# Allegro board FIBER-E1-PWR_01v0.brd
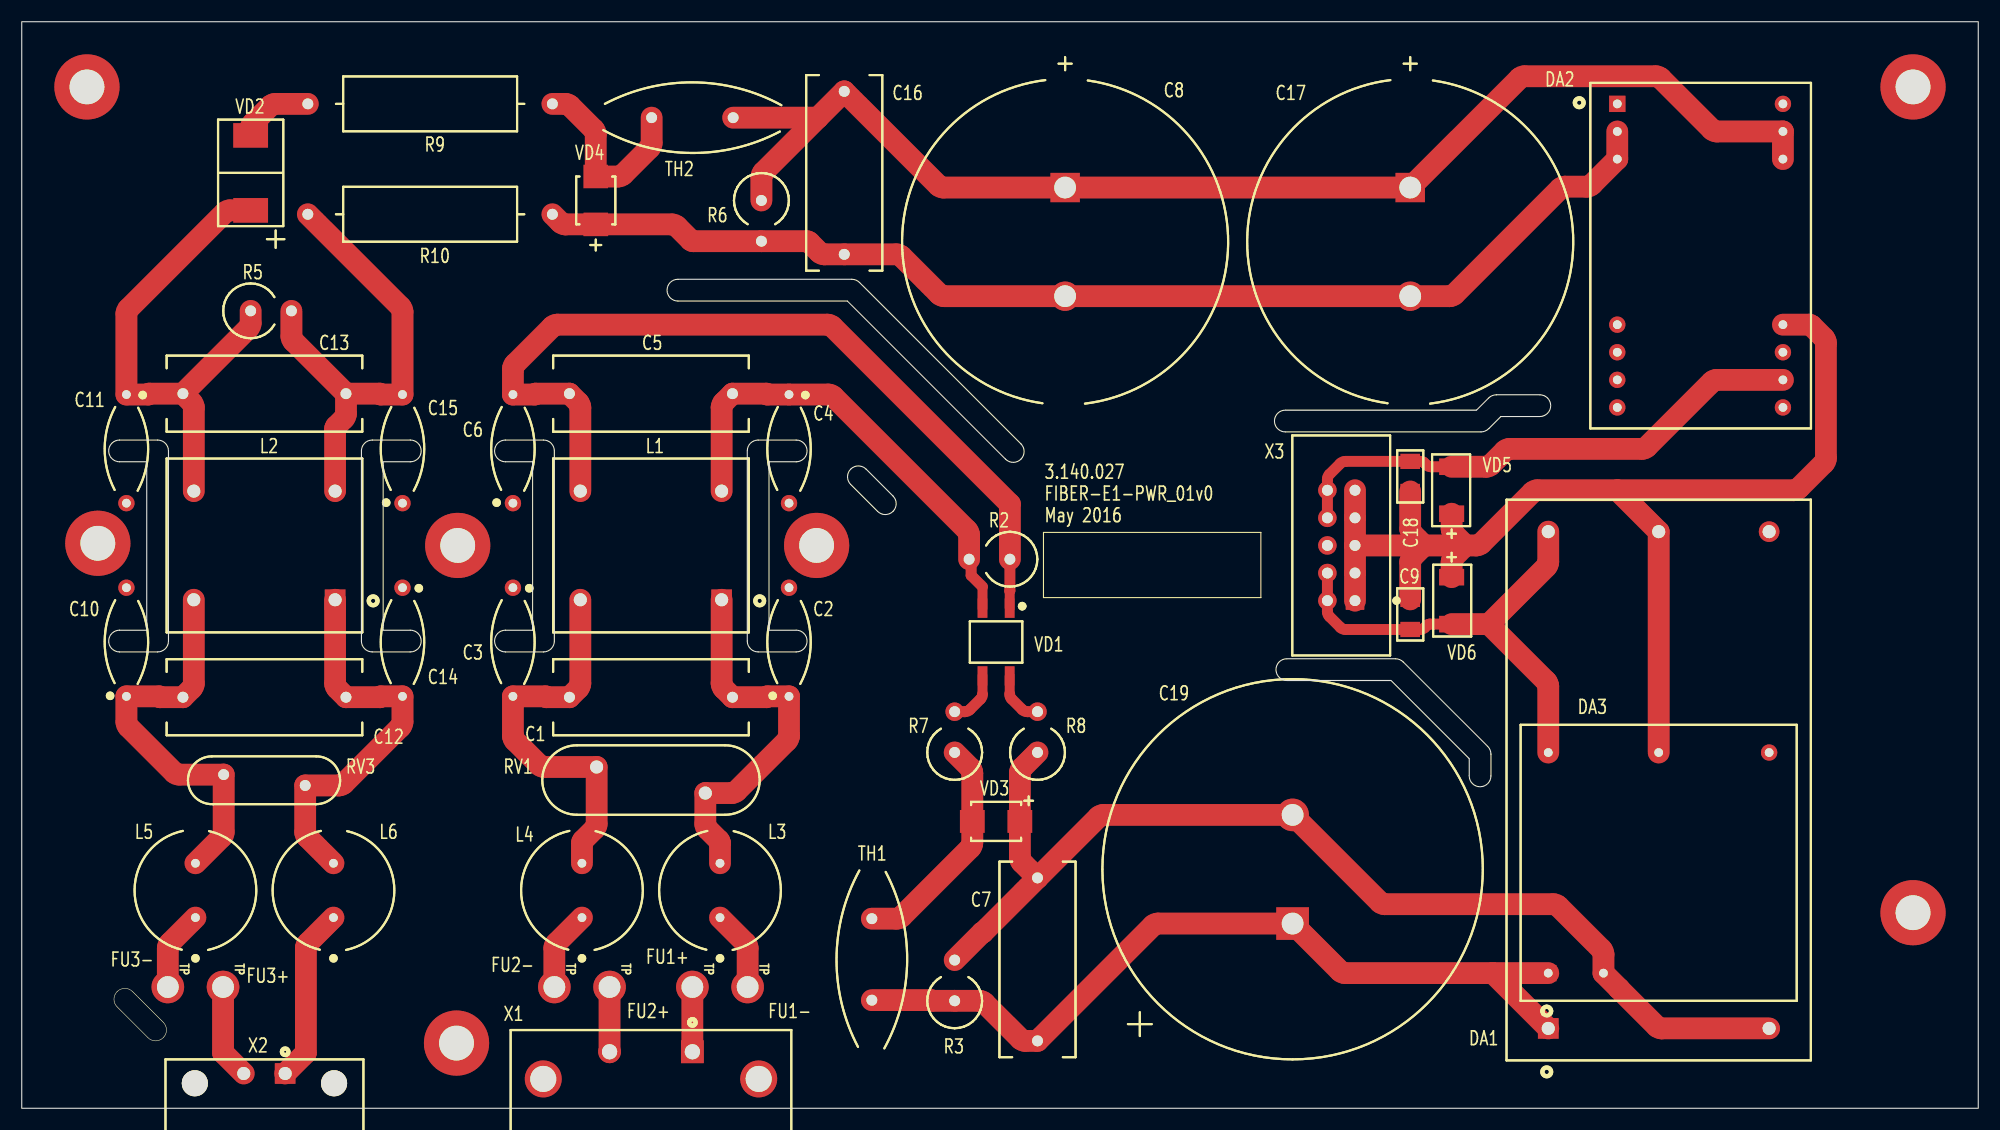
[diagram p0: board, top side]
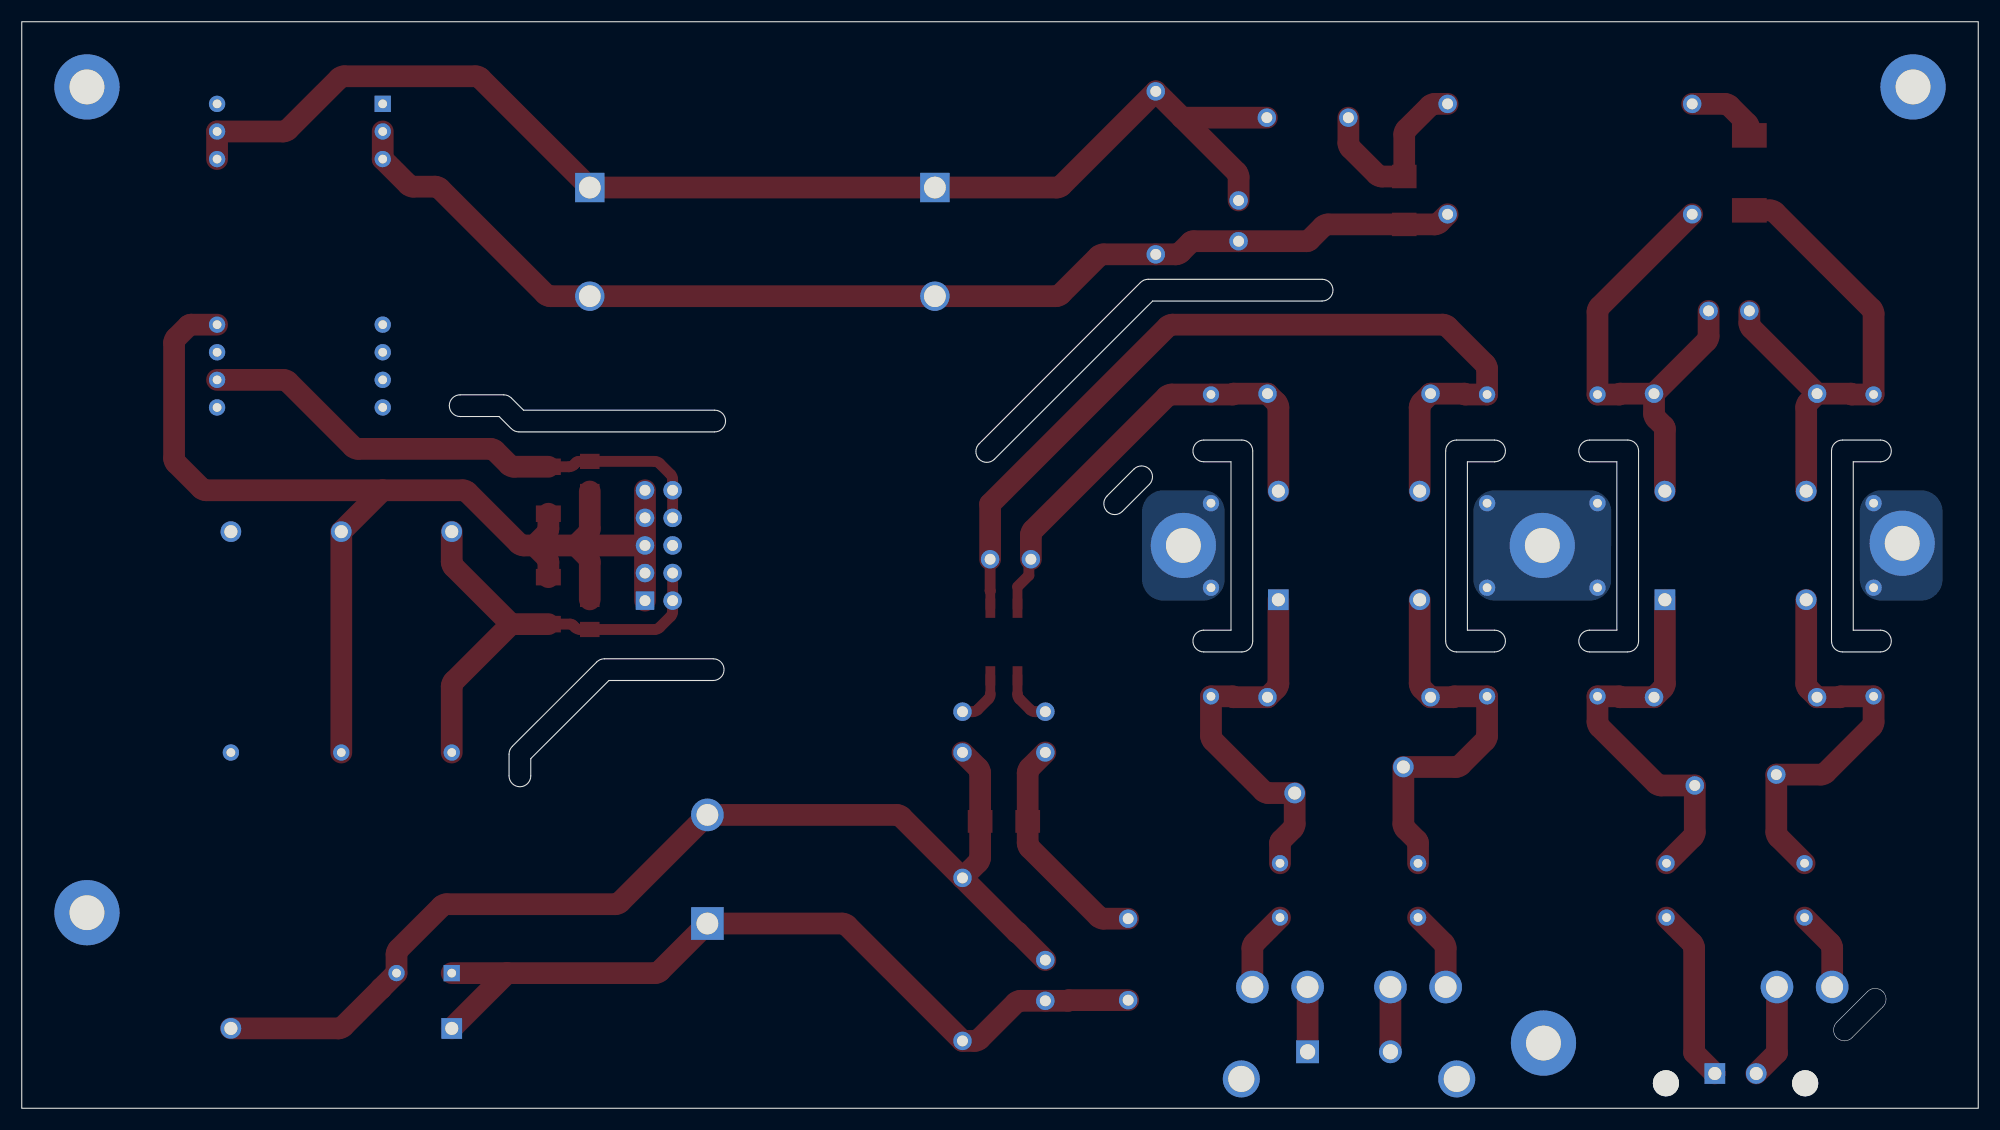
[diagram p1: board, bottom side, seen from below]

Outline 180 x 100 mm; copper layers: TOP, BOTTOM. Coordinates in mm from the lower left corner of the outline.
Outline path: rectangle 0,0 180,100 ; 8.78,10.74 arc(9.49,11.03) 10.19,10.74 13.02,7.91 arc(13.31,7.21) 13.02,6.5 arc(12.31,6.21) 11.61,6.5 8.78,9.33 arc(8.49,10.03) 8.78,10.74 ; 9,61.5 12.5,61.5 arc(13.21,61.21) 13.5,60.5 13.5,43 arc(13.21,42.29) 12.5,42 9,42 arc(8,43) 9,44 11.5,44 11.5,59.5 9,59.5 arc(8,60.5) 9,61.5 ; 31.25,60.5 arc(31.54,61.21) 32.25,61.5 35.75,61.5 arc(36.75,60.5) 35.75,59.5 33.25,59.5 33.25,44 35.75,44 arc(36.75,43) 35.75,42 32.25,42 arc(31.54,42.29) 31.25,43 31.25,60.5 ; 44.5,61.5 48,61.5 arc(48.71,61.21) 49,60.5 49,43 arc(48.71,42.29) 48,42 44.5,42 arc(43.5,43) 44.5,44 47,44 47,59.5 44.5,59.5 arc(43.5,60.5) 44.5,61.5 ; 60.37,76.3 76.37,76.3 arc(76.76,76.22) 77.09,75.99 91.92,61.15 arc(92.22,60.45) 91.92,59.74 arc(91.22,59.45) 90.51,59.74 75.95,74.3 60.37,74.3 arc(59.37,75.3) 60.37,76.3 ; 66.75,60.5 arc(67.04,61.21) 67.75,61.5 71.25,61.5 arc(72.25,60.5) 71.25,59.5 68.75,59.5 68.75,44 71.25,44 arc(72.25,43) 71.25,42 67.75,42 arc(67.04,42.29) 66.75,43 66.75,60.5 ; 76.27,58.83 arc(76.97,59.12) 77.68,58.83 80.16,56.35 arc(80.45,55.64) 80.16,54.94 arc(79.45,54.64) 78.74,54.94 76.27,57.41 arc(75.97,58.12) 76.27,58.83 ; 116.25,64.25 133.84,64.25 134.94,65.36 arc(135.27,65.58) 135.66,65.66 139.66,65.66 arc(140.66,64.66) 139.66,63.66 136.08,63.66 134.97,62.55 arc(134.64,62.33) 134.25,62.25 116.25,62.25 arc(115.25,63.25) 116.25,64.25 ; 116.39,41.37 126.39,41.37 arc(126.78,41.29) 127.11,41.06 134.86,33.31 arc(135.09,32.98) 135.17,32.59 135.17,30.59 arc(134.17,29.59) 133.17,30.59 133.17,32.18 125.98,39.37 116.39,39.37 arc(115.39,40.37) 116.39,41.37

## Design rules (mm)
nets with their own width: min track width 2; nets GND_EARTH

## Placement (name value [footprint] x y rotation side)
C1  0.22uF  [CAPRR1500W80L1800T700H1250N]  57.89 37.83 0 top
C2  470pF  [CAPRR1000W55L900T400H900N]  70.59 42.91 90 top
C3  470pF  [CAPRR1000W55L900T400H900N]  45.19 42.91 270 top
C4  470pF  [CAPRR1000W55L900T400H900N]  70.59 60.69 270 top
C5  0.22uF  [CAPRR1500W80L1800T700H1250N]  57.89 65.77 0 top
C6  470pF  [CAPRR1000W55L900T400H900N]  45.19 60.69 90 top
C7  0.22uF  [CAPRR1500W80L1800T700H1250N]  93.45 13.7 270 top
C8  4700uF  [CAPPRR1000W150L3000T3000H4000N]  95.99 79.74 270 top
C9  1uF  [CAPC3216X110N]  127.74 45.45 90 top
C10  470pF  [CAPRR1000W55L900T400H900N]  9.63 42.91 90 top
C11  470pF  [CAPRR1000W55L900T400H900N]  9.63 60.69 270 top
C12  0.22uF  [CAPRR1500W80L1800T700H1250N]  22.33 37.83 180 top
C13  0.22uF  [CAPRR1500W80L1800T700H1250N]  22.33 65.77 180 top
C14  470pF  [CAPRR1000W55L900T400H900N]  35.03 42.91 270 top
C15  470pF  [CAPRR1000W55L900T400H900N]  35.03 60.69 90 top
C16  0.22uF  [CAPRR1500W80L1800T700H1250N]  75.67 86.09 90 top
C17  4700uF  [CAPPRR1000W150L3000T3000H4000N]  127.74 79.74 270 top
C18  1uF  [CAPC3216X110N]  127.74 58.15 270 top
C19  470uF  [CAPPRR1000W55L3500T3500H5000N]  116.92 22 90 top
DA1  AMEL5-5SEMAZ  [DIP1016P4572X1780-6N]  150.6 30.21 90 top
DA2  AM3T-4805SH35Z  [DIP254P1524X1020-24N]  154.41 78.47 0 top
DA3  TMPS 03-105  [DIP1016P2030X1630-6N]  150.6 22.59 90 top
FU1+  TP  [KP_W150H100]  61.7 11.16 0 top
FU1-  TP  [KP_W150H100]  66.78 11.16 0 top
FU2+  TP  [KP_W150H100]  54.08 11.16 0 top
FU2-  TP  [KP_W150H100]  49 11.16 0 top
FU3+  TP  [KP_W150H100]  18.52 11.16 0 top
FU3-  TP  [KP_W150H100]  13.44 11.16 0 top
L1  PLY10AN1521R6R2B  [FIL_PLY10]  57.89 51.8 180 top
L2  PLY10AN1521R6R2B  [FIL_PLY10]  22.33 51.8 180 top
L3  22u  [INDRR500W65L1120T1120H1220N]  64.24 20.05 90 top
L4  22u  [INDRR500W65L1120T1120H1220N]  51.54 20.05 90 top
L5  22u  [INDRR500W65L1120T1120H1220N]  15.98 20.05 90 top
L6  22u  [INDRR500W65L1120T1120H1220N]  28.68 20.05 90 top
NOREF  -  [unnamed]  174 18 0 top
NOREF#2  -  [#2]  6 94 0 top
NOREF#3  -  [#2]  121.39 51.8 0 top
NOREF#4  -  [#2]  0 0 90 top
NOREF#5  -  [unnamed]  6 94 0 top
NOREF#6  -  [unnamed]  174 94 0 top
NOREF#7  TP  [unnamed]  40 6 0 top
NOREF#8  -  [#2]  0 100 0 top
NOREF#9  -  [#2]  40 6 90 top
NOREF#10  -  [#2]  174 18 90 top
NOREF#11  -  [#2]  70.8 -4.8 90 top
NOREF#12  -  [#2]  6 94 90 top
NOREF#13  -  [#2]  40 6 0 top
NOREF#14  -  [#2]  121.39 51.8 90 top
R2  1M  [RESAD2250W80L1600D505N]  90.91 50.53 0 top
R3  1M  [RESAD2250W80L1600D505N]  85.83 9.89 270 top
R5  1M  [RESAD2250W80L1600D505N]  21.06 73.39 180 top
R6  1M  [RESAD2250W80L1600D505N]  68.05 83.55 90 top
R7  510  [RESAD2250W80L1600D505N]  85.83 32.75 270 top
R8  510  [RESAD2250W80L1600D505N]  93.45 32.75 270 top
R9  5.1  [RESAD2250W80L1600D505N#2]  37.57 92.44 0 top
R10  5.1  [RESAD2250W80L1600D505N#2]  37.57 82.28 0 top
RV1  390V  [VAR_JVR-20N391K]  57.89 30.21 180 top
RV3  82V  [VAR_JVR-14N820K]  22.33 30.21 0 top
TH1  7  [RESRB750W80L1750T650H2300]  78.21 13.7 90 top
TH2  7  [RESRB750W80L1750T650H2300]  61.7 91.17 180 top
TP1  TP  [KP_W310H180]  40.11 51.8 0 top
TP2  TP  [KP_W310H180]  73.13 51.8 0 top
TP3  TP  [KP_W310H180]  7 52 0 top
VD1  B8S  [SOT250P700X270-4N]  89.64 42.91 270 top
VD2  S3M  [DIOM7959X265N]  21.06 86.09 270 top
VD3  400V  [DIOM5436X230N]  89.64 26.4 0 top
VD4  48V  [DIOM5436X250N]  52.81 83.55 270 top
VD5  6V8  [DIOM5336X265N]  131.55 56.88 270 top
VD6  6V8  [DIOM5336X265N]  131.55 46.72 90 top
X1  220VAC  [PHOENIX_1806229]  61.7 5.2 0 top
X2  48VDC  [PHOENIX_1827868]  24.23 3.2 0 top
X3  IDC-10M  [SHDR0S254P5X2_2025X900X900]  122.66 46.72 90 top

## Library data of the parts
C1-C7 C9-C16 C18 = CAPACITOR
C8 C17 C19 = CAPACITOR_POL
DA1 = AMEL5_xSxMAZ
DA2 = AM3T_SH35Z_3
DA3 = TRACO_TMPS 03_0
FU1+ FU1- FU2+ FU2- FU3+ FU3- TP1-TP3 = TP
L1 L2 = PLY10_0
L3-L6 = INDUCTOR
R2 R3 R5 R6 = R_0: alternate symbols: (RESAD375W80L505D505N)
R7-R10 = R_2W: alternate symbols: (RESAD375W80L505D505N)
RV1 RV3 = VARISTOR
TH1 TH2 = thermistor
VD1 = DIOD_MOST_0
VD2 = DIODE
VD3 = SUPRESSOR_POL_0
VD4 = SUPRESSOR_POL_2
VD5 VD6 = SUPRESSOR_POL
X1 = CONN2_SHIELD_3
X2 = CONN2_0
X3 = CONN10: alternate symbols: (IDC10M_EDGE)

## Footprints (pads in the part's own frame, mm; a bottom-side part is the same pattern mirrored in y, then rotated)
CAPC3216X110N
  rect 1.4x1.8 smd: 1(-1.385,0) 2(1.385,0)
CAPPRR1000W55L3500T3500H5000N
  rect 3x3 hole 2: 1(-5,0)
  round 3 hole 2: 2(5,0)
CAPPRR1000W150L3000T3000H4000N
  rect 2.7x2.7 hole 2: 1(-5,0)
  round 2.7 hole 2: 2(5,0)
CAPRR1000W55L900T400H900N
  round 1.5 hole 0.8: 1(-5,0) 2(5,0)
CAPRR1500W80L1800T700H1250N
  round 1.7 hole 1: 1(-7.5,0) 2(7.5,0)
DIOM5336X265N
  rect 1.52x2.3 smd: 1(-2.162,0) 2(2.162,0)
DIOM5436X230N
  rect 2.275x2.1 smd: 1(-2.188,0) 2(2.188,0)
DIOM5436X250N
  rect 2.16x2.26 smd: 1(-2.205,0) 2(2.205,0)
DIOM7959X265N
  rect 2.26x3.2 smd: 1(-3.45,0) 2(3.45,0)
DIP254P1524X1020-24N
  rect 1.5x1.5 hole 0.8: 1(-7.62,13.97)
  round 1.5 hole 0.8: 2(-7.62,11.43) 3(-7.62,8.89) 9(-7.62,-6.35) 10(-7.62,-8.89) 11(-7.62,-11.43) 12(-7.62,-13.97) 13(7.62,-13.97) 14(7.62,-11.43) 15(7.62,-8.89) 16(7.62,-6.35) 22(7.62,8.89) 23(7.62,11.43) 24(7.62,13.97)
DIP1016P2030X1630-6N
  rect 1.5x1.5 hole 0.8: 1(-10.15,10.16)
  round 1.5 hole 0.8: 2(-10.15,5.08) 3(10.15,-10.16) 4(10.15,0) 5(10.15,10.16)
DIP1016P4572X1780-6N
  rect 1.9x1.9 hole 1.2: 1(-22.86,10.16)
  round 1.9 hole 1.2: 2(-22.86,-10.16) 3(22.86,10.16) 4(22.86,0) 5(22.86,-10.16)
FIL_PLY10
  rect 1.9x1.9 hole 1.2: 1(-6.5,5)
  round 1.9 hole 1.2: 2(-6.5,-5) 3(6.5,-5) 4(6.5,5)
INDRR500W65L1120T1120H1220N
  round 1.5 hole 0.8: 1(-2.5,0) 2(2.5,0)
KP_W150H100
  round 3 hole 2: 1(0,0)
KP_W310H180
  round 6 hole 3.2: 1(0,0)
PHOENIX_1806229
  rect 2.1x2.1 hole 1.4: 1(0,0)
  round 2.1 hole 1.4: 2(-7.62,0)
  round 3.4 hole 2.4: SHIELD1(-13.72,-2.5) SHIELD2(6.1,-2.5)
PHOENIX_1827868
  round 2.4 hole 2.4 unplated: (-8.31,-0.9) (4.5,-0.9)
  rect 1.9x1.9 hole 1.2: 1(0,0)
  round 1.9 hole 1.2: 2(-3.81,0)
RESAD2250W80L1600D505N
  round 1.7 hole 1: 1(-3.75,0) 2(0,0)
RESAD2250W80L1600D505N#2
  round 1.7 hole 1: 1(-11.25,0) 2(11.25,0)
RESRB750W80L1750T650H2300
  round 1.7 hole 1: 1(-3.75,0) 2(3.75,0)
SHDR0S254P5X2_2025X900X900
  rect 1.7x1.7 hole 1: 1(0,0)
  round 1.7 hole 1: 2(0,2.54) 3(2.54,0) 4(2.54,2.54) 5(5.08,0) 6(5.08,2.54) 7(7.62,0) 8(7.62,2.54) 9(10.16,0) 10(10.16,2.54)
SOT250P700X270-4N
  rect 1.775x0.9 smd: 1(-3.112,1.25) 2(-3.112,-1.25) 3(3.112,-1.25) 4(3.112,1.25)
unnamed
  round 6 hole 3.2: 1(0,0)
VAR_JVR-14N820K
  round 1.7 hole 1: 1(-3.75,0.5) 2(3.75,-0.5)
VAR_JVR-20N391K
  round 1.9 hole 1.2: 1(-5,1.2) 2(5,-1.2)

## Nets
GND: C9.2 C18.2 DA1.4(-VOUT) DA2.16(-VOUT) DA3.4(-VOUT) VD5.2(ANODE) VD6.2(ANODE) X3.1 X3.3 X3.5 X3.7 X3.9
GND_EARTH: C2.2 C3.1 C4.2 C6.1 C10.2 C11.2 C14.1 C15.1 TP1.1 TP2.1 TP3.1
N1859833: FU1+.1 X1.1(-)
N1859855: C1.2 C2.1 L1.1 L3.2 RV1.1
N1859873: C1.1 C3.2 L1.4 L4.2 RV1.2
N1860629: C4.1 C5.2 L1.2 R2.1 VD1.2(IN2)
N1860633: C5.1 C6.2 L1.3 R2.2 VD1.1(IN1)
N1861955: C7.1 C19.2 DA1.2(AC_L) DA3.2(AC_L) R3.1 R8.2 VD3.2(ANODE)
N1861963: C7.2 C19.1 DA1.1(AC_N) DA3.1(AC_N) R3.2 TH1.1
N1862585: C9.1 DA1.3(+VOUT) DA3.5(+VOUT) VD6.1(CATHODE) X3.2 X3.4
N1866469: C18.1 DA2.14(+VOUT) VD5.1(CATHODE) X3.8 X3.10
N1869514: C11.1 C13.2 L2.3 R5.2 VD2.2(ANODE)
N1869554: C8.1 C16.2 C17.1 DA2.22(+V IN#22) DA2.23(+V IN#23) R6.2 TH2.1
N1869574: C8.2 C16.1 C17.2 DA2.2(-V IN#2) DA2.3(-V IN#3) R6.1 R10.2 VD4.2(ANODE)
N1869794: C10.1 C12.2 L2.4 L5.2 RV3.1
N1869810: C12.1 C14.2 L2.1 L6.2 RV3.2
N1869998: C13.1 C15.2 L2.2 R5.1 R10.1
N1874089: FU1-.1 L3.1
N1874294: FU2+.1 X1.2(+)
N1874423: FU3+.1 X2.2(+)
N1874427: FU3-.1 L5.1
N1874451: L6.1 X2.1(-)
N1877590: R9.1 VD2.1(CATHODE)
N1878411: R7.2 TH1.2 VD3.1(CATHODE)
N1878415: R7.1 VD1.3(+)
N1878419: R8.1 VD1.4(-)
N1878478: R9.2 TH2.2 VD4.1(CATHODE)
N1898564: FU2-.1 L4.1

Pads without a net: DA1 5; DA2 1 9 10 11 12 13 15 24; DA3 3; NOREF 1; NOREF#5 1; NOREF#6 1; NOREF#7 1; X1 SHIELD1 SHIELD2; X3 6

## Routing (per net, layer and track width the routed paths; a pad name or vN(x,y) marks a point on that pad's centre or on a via; arc(x,y) is an arc through that point)
GND: length 115.7
  TOP w2: C9.2 127.74,50.27 arc(127.79,50.51) 127.93,50.72 129.01,51.8 ; X3.1 X3.3 X3.5 ; 146.79,56.88 DA1.4 DA3.4 ; 146.79,56.88 139.43,56.88 arc(139.19,56.83) 138.98,56.69 134.28,51.99 arc(134.07,51.85) 133.83,51.8 132.82,51.8 ; 146.79,56.88 163.04,56.88 arc(163.28,56.93) 163.49,57.07 165.8,59.38 arc(165.94,59.59) 165.99,59.83 165.99,70.44 arc(165.94,70.69) 165.8,70.89 164.66,72.03 arc(164.56,72.1) 164.44,72.12 DA2.16 ; 129.01,51.8 127.93,52.88 arc(127.79,53.09) 127.74,53.33 C18.2 ; 129.01,51.8 132.82,51.8 ; 129.01,51.8 X3.5 ; X3.5 X3.7 X3.9 ; 132.82,51.8 131.74,52.88 arc(131.6,53.09) 131.55,53.33 VD5.2 ; 132.82,51.8 131.74,50.72 arc(131.6,50.51) 131.55,50.27 VD6.2
N1859833: length 6
  TOP w2: X1.1 FU1+.1
N1859855: length 35.2
  TOP w2: L1.1 64.39,39.09 arc(64.44,38.85) 64.58,38.64 C1.2 68.51,37.83 68.59,37.91 C2.1 70.59,34.28 arc(70.54,34.04) 70.4,33.83 65.77,29.2 arc(65.56,29.06) 65.32,29.01 RV1.1 62.89,26.16 arc(62.94,25.92) 63.08,25.71 64.15,24.64 arc(64.22,24.54) 64.24,24.42 L3.2
N1859873: length 36.6
  TOP w2: L4.2 51.54,24.42 arc(51.56,24.54) 51.63,24.64 52.7,25.71 arc(52.84,25.92) 52.89,26.16 RV1.2 48.06,31.41 arc(47.82,31.46) 47.61,31.6 45.38,33.83 arc(45.24,34.04) 45.19,34.28 C3.2 48.21,37.91 48.29,37.83 C1.1 51.2,38.64 arc(51.34,38.85) 51.39,39.09 L1.4
N1860629: length 43.9
  TOP w0.9: VD1.2 88.39,48
  TOP w1: 88.39,48 87.34,49.05 87.34,50.34 R2.1
  TOP w2: R2.1 87.16,52.75 arc(87.11,52.99) 86.97,53.2 74.67,65.5 arc(74.46,65.64) 74.22,65.69 C4.1 68.59,65.69 68.51,65.77 C5.2 64.58,64.96 arc(64.44,64.75) 64.39,64.51 L1.2
N1860633: length 80.9
  TOP w0.9: VD1.1 90.89,47.61
  TOP w1: 90.89,47.61 90.91,47.63 R2.2
  TOP w2: L1.3 51.39,64.51 arc(51.34,64.75) 51.2,64.96 C5.1 47.27,65.77 47.19,65.69 C6.2 45.19,68.05 arc(45.24,68.29) 45.38,68.5 48.81,71.93 arc(49.02,72.07) 49.26,72.12 74.14,72.12 arc(74.38,72.07) 74.59,71.93 90.91,55.61 R2.2
N1861955: length 102.5
  TOP w2: C7.1 99.06,26.81 arc(99.27,26.95) 99.51,27 C19.2 124.95,18.97 arc(125.16,18.83) 125.4,18.78 140.92,18.78 arc(141.16,18.73) 141.37,18.59 145.33,14.63 arc(145.47,14.42) 145.52,14.18 DA3.2 146.94,11.03 146.94,11.02 150.41,7.54 arc(150.62,7.4) 150.86,7.35 DA1.2 ; C7.1 88.43,16.18 88.37,16.18 R3.1 ; C7.1 92.01,22.64 arc(91.88,22.84) 91.83,23.09 VD3.2 91.83,30.86 arc(91.88,31.11) 92.01,31.31 R8.2
N1861963: length 77.2
  TOP w2: TH1.1 83.67,9.95 83.73,9.89 R3.2 88.11,9.89 arc(88.35,9.84) 88.56,9.7 91.87,6.39 arc(92.08,6.25) 92.32,6.2 C7.2 104.06,16.81 arc(104.27,16.95) 104.51,17 C19.1 121.29,12.63 arc(121.5,12.49) 121.74,12.44 135.35,12.44 ; DA3.1 135.35,12.44 ; 135.35,12.44 DA1.1
N1862585: length 44.2
  TOP w1: X3.4 X3.2 120.12,45.71 arc(120.17,45.47) 120.31,45.26 121.32,44.25 arc(121.53,44.11) 121.77,44.06 128.63,44.06 arc(128.88,44.11) 129.08,44.25 129.29,44.47 arc(129.4,44.53) 129.52,44.56 VD6.1
  TOP w2: VD6.1 134.98,44.56 ; 134.98,44.56 140.25,39.29 arc(140.39,39.08) 140.44,38.84 DA3.5 ; 134.98,44.56 140.25,49.83 arc(140.39,50.04) 140.44,50.28 DA1.3
N1866469: length 49.6
  TOP w1: X3.8 X3.10 120.12,57.89 arc(120.17,58.13) 120.31,58.34 121.32,59.35 arc(121.52,59.49) 121.77,59.53 C18.1 128.76,59.53 arc(128.88,59.51) 128.99,59.44 129.2,59.23 arc(129.41,59.09) 129.65,59.04 VD5.1
  TOP w2: DA2.14 155.94,67.04 arc(155.7,66.99) 155.49,66.85 149.52,60.88 arc(149.31,60.74) 149.07,60.69 136.89,60.69 arc(136.65,60.64) 136.44,60.5 135.17,59.23 arc(134.96,59.09) 134.72,59.04 VD5.1
N1869514: length 47.7
  TOP w2: R5.2 21.06,72.26 arc(21.01,72.02) 20.87,71.81 C13.2 ; C13.2 11.71,65.77 11.63,65.69 C11.1 9.63,73.13 arc(9.68,73.37) 9.82,73.58 18.69,82.45 arc(18.9,82.59) 19.14,82.64 VD2.2 ; C13.2 15.64,64.96 arc(15.78,64.75) 15.83,64.51 L2.3
N1869554: length 119.8
  TOP w2: TH2.1 73.25,91.17 ; 73.25,91.17 68.24,86.16 arc(68.1,85.95) 68.05,85.71 R6.2 ; 73.25,91.17 C16.2 84.33,84.93 arc(84.54,84.79) 84.78,84.74 C8.1 C17.1 137.79,94.79 arc(138,94.93) 138.24,94.98 150.34,94.98 arc(150.58,94.93) 150.79,94.79 155.49,90.09 arc(155.7,89.95) 155.94,89.9 DA2.23 DA2.22
N1869574: length 108.6
  TOP w2: DA2.2 DA2.3 144.44,85.01 arc(144.23,84.87) 143.99,84.82 141.97,84.82 arc(141.73,84.77) 141.52,84.63 131.82,74.93 arc(131.61,74.79) 131.37,74.74 C17.2 C8.2 84.86,74.74 arc(84.62,74.79) 84.41,74.93 80.94,78.4 arc(80.73,78.54) 80.49,78.59 C16.1 73.83,78.59 arc(73.59,78.64) 73.38,78.78 72.45,79.71 arc(72.35,79.78) 72.23,79.8 R6.1 61.77,79.8 arc(61.65,79.82) 61.55,79.89 60.28,81.16 arc(60.08,81.3) 59.83,81.34 VD4.2 50.02,81.34 arc(49.77,81.39) 49.57,81.53 R10.2
N1869794: length 37.2
  TOP w2: L2.4 15.83,39.09 arc(15.78,38.85) 15.64,38.64 C12.2 12.73,37.83 12.65,37.91 C10.1 9.63,35.55 arc(9.68,35.31) 9.82,35.1 14.02,30.9 arc(14.23,30.76) 14.47,30.71 RV3.1 18.58,25.41 arc(18.53,25.17) 18.39,24.96 L5.2
N1869810: length 36.6
  TOP w2: L6.2 26.27,24.96 arc(26.13,25.17) 26.08,25.41 RV3.2 29.19,29.71 arc(29.43,29.76) 29.64,29.9 34.84,35.1 arc(34.98,35.31) 35.03,35.55 C14.2 33.03,37.91 32.95,37.83 C12.1 29.02,38.64 arc(28.88,38.85) 28.83,39.09 L2.1
N1869998: length 44.4
  TOP w2: C13.1 25,70.6 arc(24.86,70.81) 24.81,71.05 R5.1 ; C13.1 29.83,63.93 arc(29.78,63.69) 29.64,63.48 28.92,62.76 arc(28.85,62.66) 28.83,62.54 L2.2 ; C13.1 32.95,65.77 33.03,65.69 C15.2 35.03,73.31 arc(34.98,73.55) 34.84,73.76 R10.1
N1874089: length 7.4
  TOP w2: L3.1 66.59,15.2 arc(66.73,14.99) 66.78,14.75 FU1-.1
N1874294: length 6
  TOP w2: X1.2 FU2+.1
N1874423: length 8.7
  TOP w2: X2.2 18.52,5.11 FU3+.1
N1874427: length 7.4
  TOP w2: FU3-.1 13.44,14.75 arc(13.49,14.99) 13.63,15.2 L5.1
N1874451: length 16.2
  TOP w2: L6.1 26.33,15.2 arc(26.19,14.99) 26.14,14.75 26.14,5.11 X2.1
N1877590: length 6.9
  TOP w2: VD2.1 21.06,90.18 arc(21.11,90.42) 21.25,90.63 22.87,92.25 arc(23.08,92.39) 23.32,92.44 R9.1
N1878411: length 21.2
  TOP w2: R7.2 87.27,31.31 arc(87.4,31.11) 87.45,30.86 VD3.1 87.45,24.41 arc(87.4,24.17) 87.27,23.96 80.94,17.64 arc(80.73,17.5) 80.49,17.45 TH1.2
N1878415: length 5
  TOP w0.9: VD1.3 88.39,38.11
  TOP w1: R7.1 86.78,36.5 arc(87.02,36.55) 87.23,36.69 88.2,37.66 arc(88.34,37.87) 88.39,38.11
N1878419: length 5
  TOP w0.9: VD1.4 90.89,38.11
  TOP w1: R8.1 92.5,36.5 arc(92.26,36.55) 92.05,36.69 91.08,37.66 arc(90.94,37.87) 90.89,38.11
N1878478: length 18
  TOP w2: R9.2 50.01,92.44 arc(50.25,92.39) 50.46,92.25 52.62,90.09 arc(52.76,89.88) 52.81,89.64 VD4.1 54.88,85.75 arc(55.12,85.8) 55.33,85.94 57.76,88.38 arc(57.9,88.59) 57.95,88.83 TH2.2
N1898564: length 7.4
  TOP w2: FU2-.1 49,14.75 arc(49.05,14.99) 49.19,15.2 L4.1

## Copper pours and planes (outline as drawn; the poured copper is in the pictures)
GND_EARTH on BOTTOM: 69.32,48.72 69.91,47.31 71.32,46.72 74.94,46.72 76.35,47.31 76.94,48.72 76.94,54.88 76.35,56.29 74.94,56.88 71.32,56.88 69.91,56.29 69.32,54.88
GND_EARTH on BOTTOM: 33.76,48.72 34.35,47.31 35.76,46.72 44.46,46.72 45.87,47.31 46.46,48.72 46.46,54.88 45.87,56.29 44.46,56.88 35.76,56.88 34.35,56.29 33.76,54.88
GND_EARTH on BOTTOM: 3.28,48.72 3.87,47.31 5.28,46.72 8.9,46.72 10.31,47.31 10.9,48.72 10.9,54.88 10.31,56.29 8.9,56.88 5.28,56.88 3.87,56.29 3.28,54.88

## Text on the board
Ref Des/Silkscreen Top: 3.140.027 | FIBER-E1-PWR_01v0 | May 2016
DIMENSION: 3.140.003 | BCK-E1_01v2 | October 2015
